# Altium PCB A80R_EQ_Repro.PcbDoc
Units mil, origin at the board's own origin, x right, y up, seen from the top; angles counter-clockwise.
Board outline 1104 x 1180 mil, 2 copper layers (Top Layer, Bottom Layer); 9 components, 7 nets, 36 pads, 2 vias.
Unrouted connection lines stored in the file: 2.
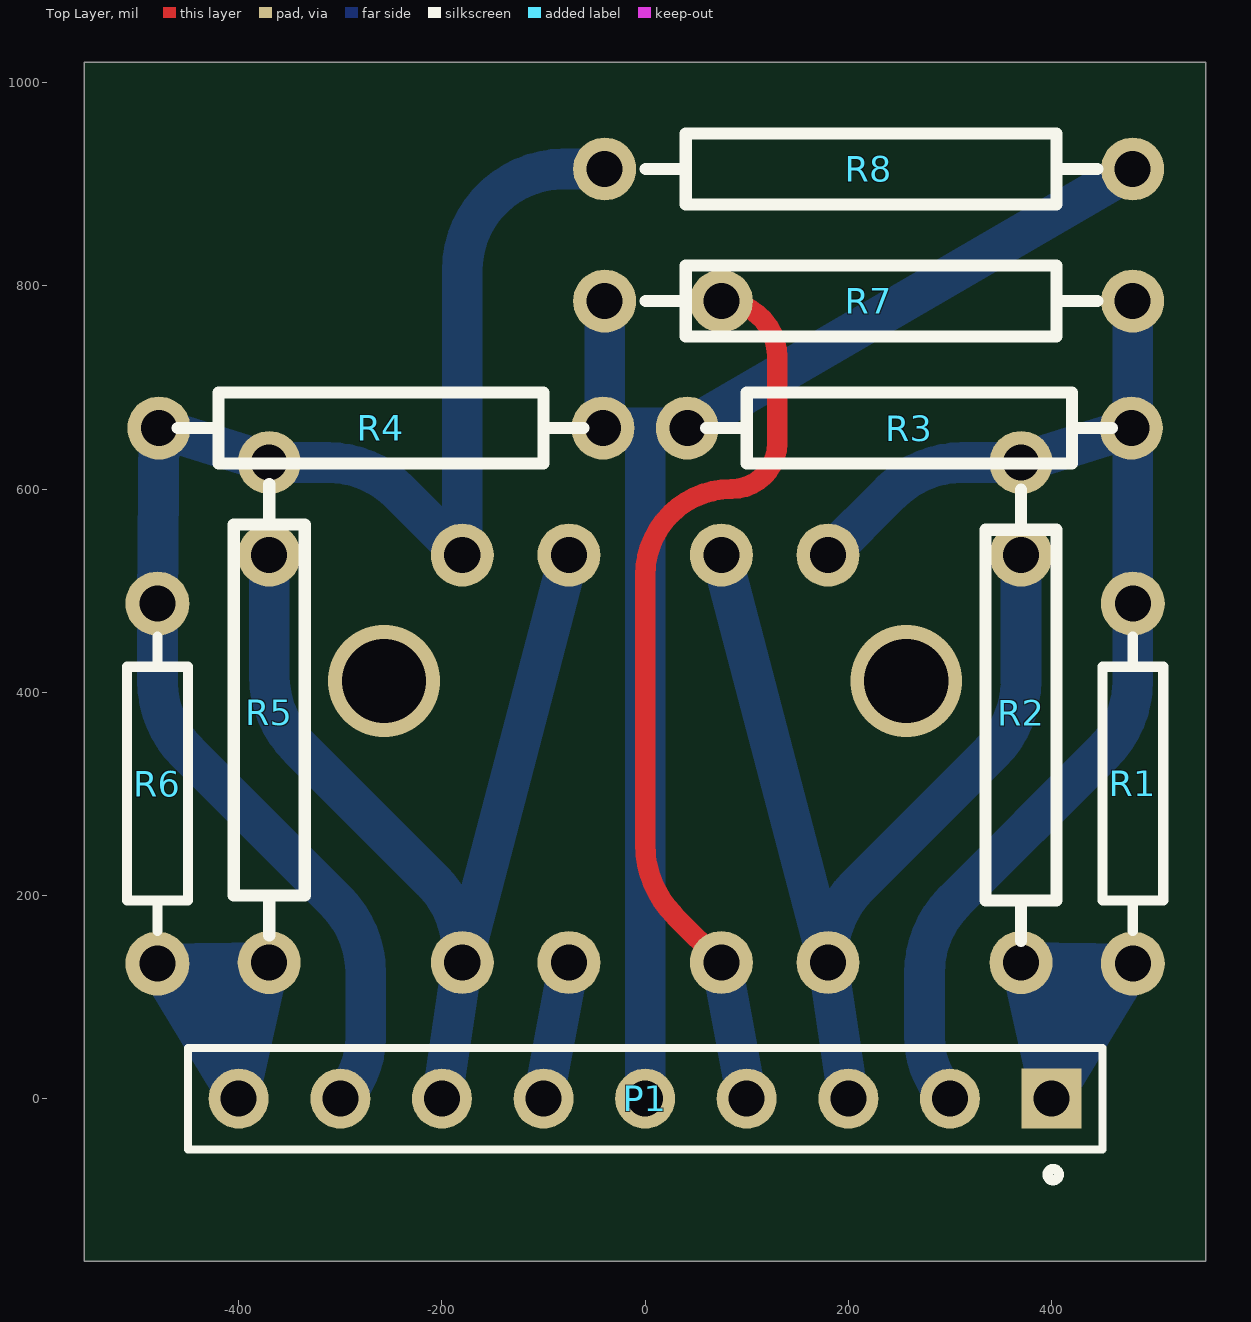
[diagram p0: Top Layer view]
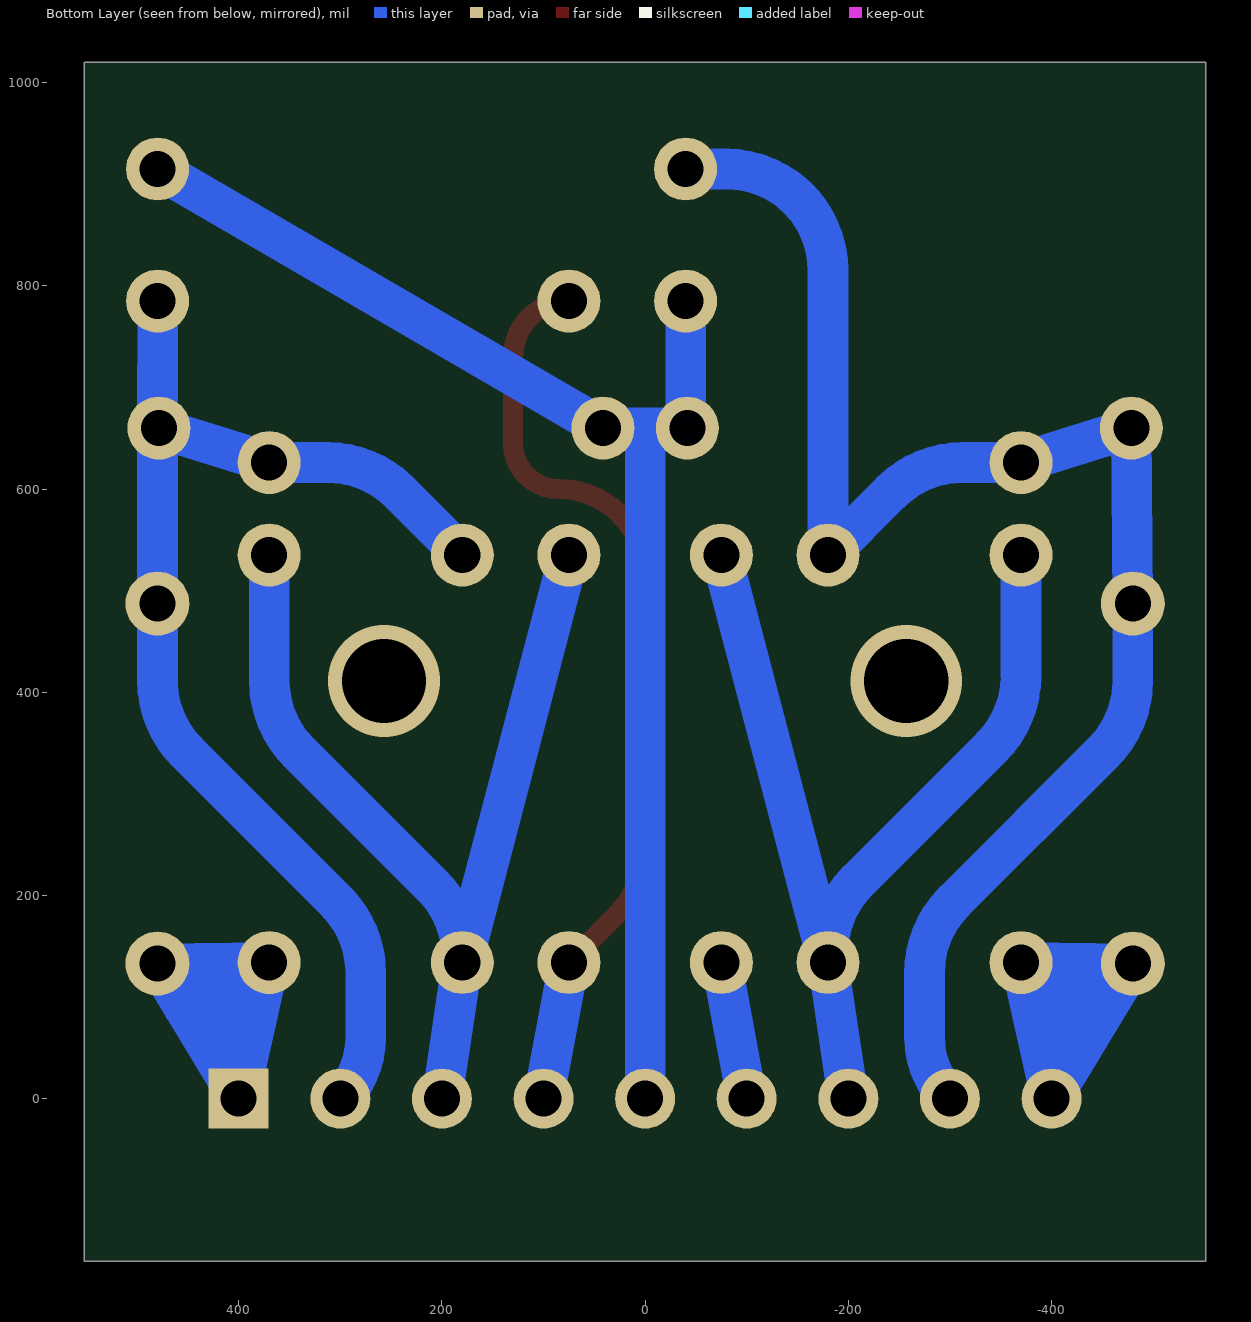
[diagram p1: Bottom Layer view, seen from below]
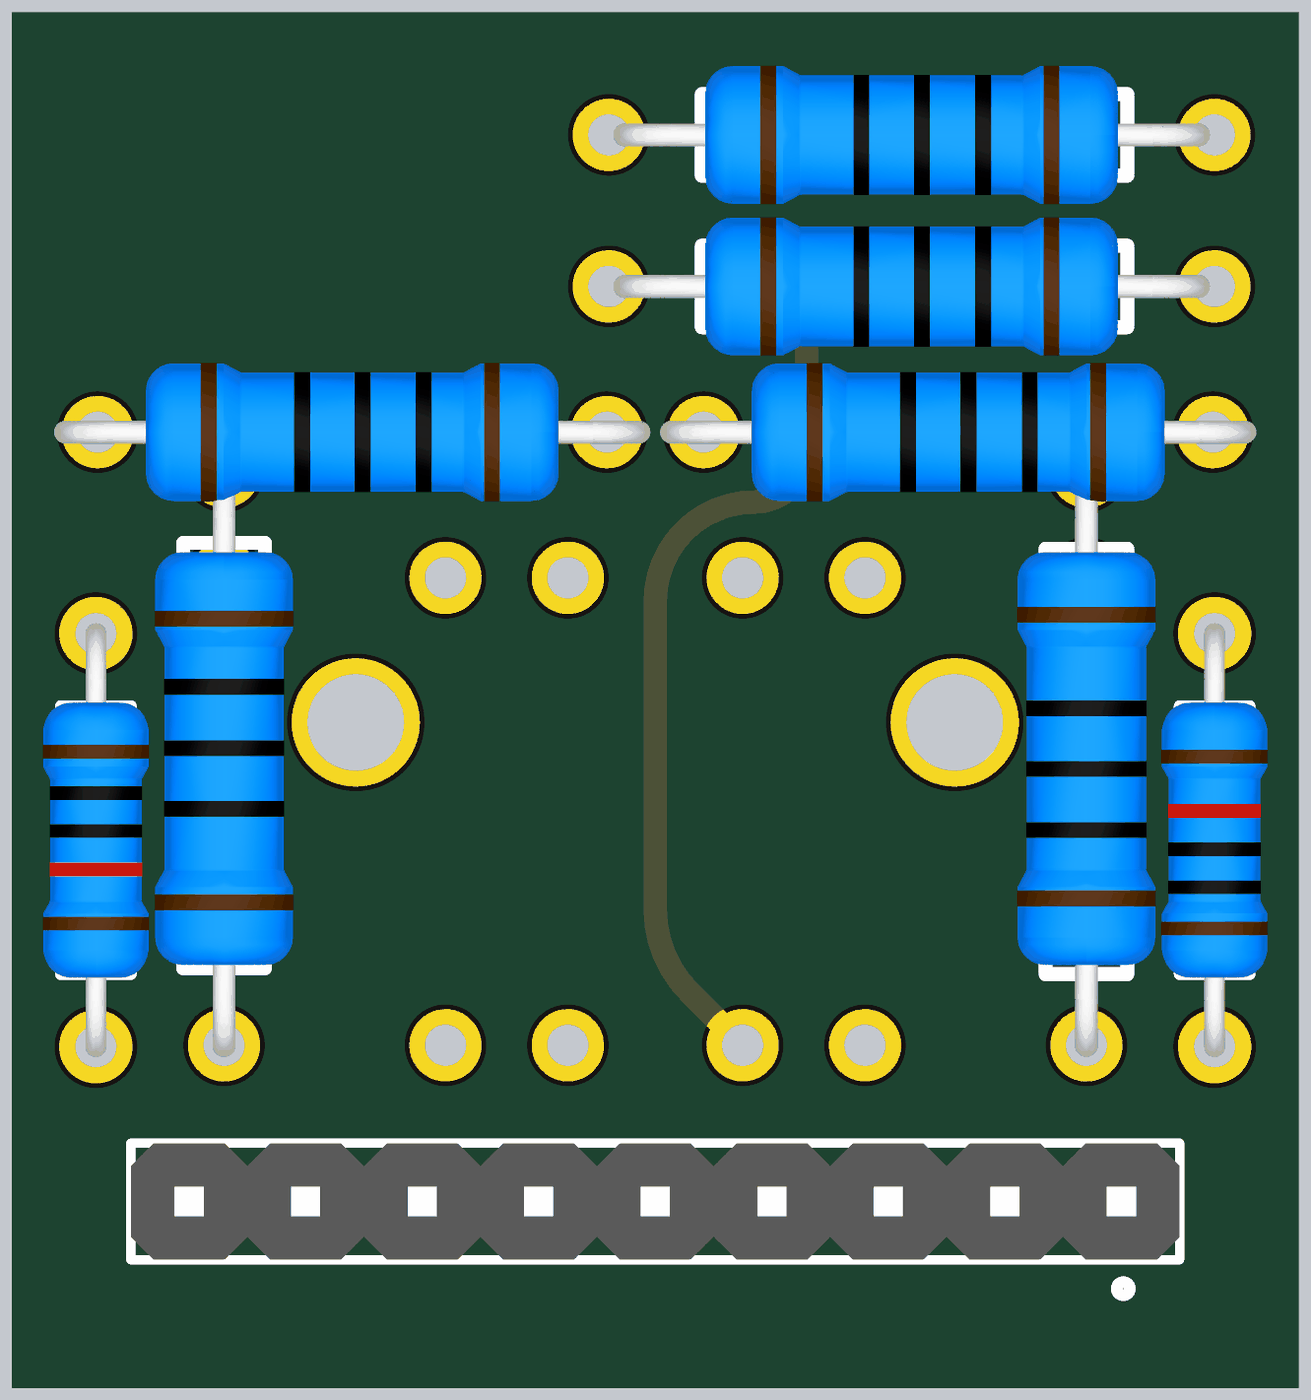
[diagram p2: 3D render of the assembled board from above, using the file's embedded part models]

## Layer stack, top to bottom
Top Solder: solder mask 0.4, Solder Resist, Dk 3.5
Top Layer: signal copper 1.4
Dielectric 1: dielectric 12.6, FR-4, Dk 4.8
Bottom Layer: signal copper 1.4
Bottom Solder: solder mask 0.4, Solder Resist, Dk 3.5

## Board outline
-552,-160 -552,1020 552,1020 552,-160

## Design rules (kind name [scope] priority, off if disabled: settings)
Clearance [All] p1: gap=10 ignorepadtopadclearanceinfootprint=FALSE except(0: Arc-Hole Track-Hole SMDPad-Hole THPad-Hole Via-Hole Fill-Hole Poly-Hole Region-Hole Text-Hole)
PolygonConnect [All] p1: connectstyle=Relief reliefconductorwidth=10 reliefentries=4 polygonreliefangle="90 Angle" airgapwidth=10
RoomDefinition A80R_EQ_Repro [InComponentClass('A80R_EQ_Repro')] p1: confinementstyle=ConfineIn formatcopy=TRUE lockcomponents=FALSE outline 1630,-600 3300,-600 3300,420 1630,420
RoutingVias [All] p1: holewidth=28 width=50 viastyle="Through Hole" minholewidth=28 minwidth=50 maxholewidth=28 maxwidth=50
SolderMaskExpansion [All] p1: expansion=4
Width [All] p1: maxlimit=80 minlimit=10 preferedwidth=20
30 further rules are at their usual default settings.

## Components (designator, comment, footprint, x,y, rotation, side; value= is the part's Value field where it differs from the comment)
P1 "Header 9" HDR1X9 400,0 r180 top
R1 "1K" "RS 1/4W-N" 480,310 r90 top
R2 "1K" "RS 1/2W-N" 370,380 r90 top
R3 "1K" "RS 1/2W-S" 260,660 r180 top
R4 "1K" "RS 1/2W-S" -260,660 r180 top
R5 "1K" "RS 1/2W-N" -370,380 r270 top
R6 "1K" "RS 1/4W-N" -480,310 r270 top
R7 "1K" "RS 1/2W-L" 220,785 r180 top
R8 "R-CRR" "RS 1/2W-L" 220,915 r180 top

## Footprints (in the part's own frame and the unit in brackets; to place one, negate y for a bottom-side part, rotate by r counter-clockwise, add the part's x,y. Pads: shape width x height; smd on the part's side, far side on the other; paste and mask are expansions set on the pad)
HDR1X9 [mm] "Connector; Header; 9 Position"
  rect 1.5x1.5 hole 0.9: 1(0,0)
  round 1.5 hole 0.9: 2(2.54,0) 3(5.08,0) 4(7.62,0) 5(10.16,0) 6(12.7,0) 7(15.24,0) 8(17.78,0) 9(20.32,0)
  silkscreen extent -1.27,-1.27 21.59,2.04, body extent -1.27,-1.27 21.59,1.27, height 8.54
"RS 1/2W-L" [mil] "直插色环电阻，脚距12.5mm，直径3mm"
  round 62 hole 35.43: 1(-259.84,0) 2(259.84,0)
  silkscreen extent -225,-35 219,35, body extent -256,-59 256,59, height 122
"RS 1/2W-N" [mil] "直插色环电阻，脚距12.5mm，直径3mm"
  round 62 hole 35.43: 1(-246.06,0) 2(246.06,0)
  silkscreen extent -225,-35 219,35, body extent -256,-59 256,59, height 122
"RS 1/2W-S" [mil] "直插色环电阻，脚距12.5mm，直径3mm"
  round 62 hole 35.43: 1(-218.5,0) 2(218.5,0)
  silkscreen extent -199,-35 200,35, body extent -256,-59 256,59, height 122
"RS 1/4W-N" [mm] "直插色环电阻，脚距9mm，直径2.3mm"
  round 1.6 hole 0.9: 1(-4.5,0) 2(4.5,0)
  silkscreen extent -3.68,-0.76 3.68,0.76, body extent -4.72,-1.16 4.73,1.16, height 2.32

## Part data
P1: "Header, 9-Pin", LatestRevisionDate=17-Jul-2002, LatestRevisionNote="Re-released for DXP Platform.", Publisher="Altium Limited"
R1 R2 R3 R4 R5 R6 R7: library part R-CRR, "直插色环电阻", BOM名称=色环电阻, 学习资源=www.ooocke.com, 版权归属=源创客
R8: "直插色环电阻", BOM名称=色环电阻, 学习资源=www.ooocke.com, 版权归属=源创客

## Free pads (board coordinates)
  round 62 hole 35.5: 3(-370,535) 4(-75,535) 5(75,535) 6(370,535) 7(-180,535) 8(180,535) 9(-180,134) 10(-75,134) 11(75,134) 12(180,134) 13(75,785)

## Via types
v1: diameter 110, hole 83, Top Layer to Bottom Layer, 2 vias

## Nets (pads, with @x,y where several pads share a name; then routed paths per layer and width w, separated by ;. In a path a pad name is that pad's centre, name@x,y a point inside that pad or via, vN(x,y) a via of type N, cw(c..) or ccw(c..) an arc to the next point about the centre after c; other vN are vias at no path point)
NetP1_1: P1.1 R1.1 R2.1 | length 606.7
  Bottom Layer w40: R2.1 P1.1 ; R2.1 R1.1 453.96,89.6 ; R2.1 420,107.54 ; P1.1 453.96,89.6 ; P1.1 420,107.54 ; 420,107.54 453.96,89.6
NetP1_2: P1.2 pad.8 R1.2 R2.2 R3.1 R7.1 | length 1205.1
  Bottom Layer w40: pad.8 241.77,596.77 cw(c312.48,526.06) 312.48,626.06 R2.2 R3.1 ; P1.2 cw(c360.36,60.36) 275,60.36 275,123.58 cw(c375,123.58) 304.29,194.29 450.71,340.71 ccw(c380,411.42) 480,411.42 R1.2 479.91,660 R7.1
NetP1_3: P1.3 P1.4 pad.5 pad.6 pad.11 pad.12 pad.13 | length 1940.8
  Top Layer w20: pad.11 29.29,179.71 cw(c100,250.42) 0,250.42 0,515 cw(c85,515) 85,600 ccw(c85,645) 130,645 130,730 ccw(c75,730) pad.13
  Bottom Layer w40: pad.11 P1.4 ; pad.5 pad.12 ; P1.3 pad.12 ; pad.6 370,411.42 cw(c270,411.42) 340.71,340.71 209.29,209.29 ccw(c280,138.58) 180,138.58 pad.12
NetP1_5: P1.5 R3.2 R4.1 R7.2 R8.1 | length 1375.8
  Bottom Layer w40: R7.2 -39.84,661.65 R4.1 0,660 ; P1.5 0,660 ; R8.1 R3.2 0,660
NetP1_6: P1.6 P1.7 pad.3 pad.4 pad.9 pad.10 | length 1157.4
  Bottom Layer w40: pad.3 -370,416.42 ccw(c-270,416.42) -340.71,345.71 -209.29,214.29 cw(c-280,143.58) -180,143.58 pad.9 ; P1.7 pad.9 ; P1.6 pad.10 ; pad.4 pad.9
NetP1_8: P1.8 pad.7 R4.2 R5.1 R6.1 R8.2 | length 1557.3
  Bottom Layer w40: P1.8 ccw(c-360.36,60.36) -275,60.36 -275,123.58 ccw(c-375,123.58) -304.29,194.29 -450.71,340.71 cw(c-380,411.42) -480,411.42 R6.1 R4.2 R5.1 -312.48,626.06 cw(c-312.48,526.06) -241.77,596.77 pad.7 -180,815 cw(c-80,815) -80,915 R8.2
NetP1_9: P1.9 R5.2 R6.2 | length 687.2
  Bottom Layer w40: R6.2 R5.2 ; R6.2 P1.9 -379.36,92.14 ; R6.2 -415,65 -393.54,97.87 ; R6.2 -393.54,97.87 ; -393.54,97.87 -385.84,94.76 -379.36,92.14 ; -393.54,97.87 R5.2 ; -379.36,92.14 R5.2
copper on no net:
  other v1: -257,411 257,411

## Silkscreen, mask and mechanical layers (free items; w line width, h text height)
Drill Drawing:
  the board outline again, w10